# Altium PCB MOD_PWR_SW_PCB.PcbDoc
Units mm, origin at the board's own origin, x right, y up, seen from the top; angles counter-clockwise.
Board outline 152.4 x 101.6 mm, 2 copper layers (Top Layer, Bottom Layer); 37 components, 23 nets, 91 pads, 8 vias.
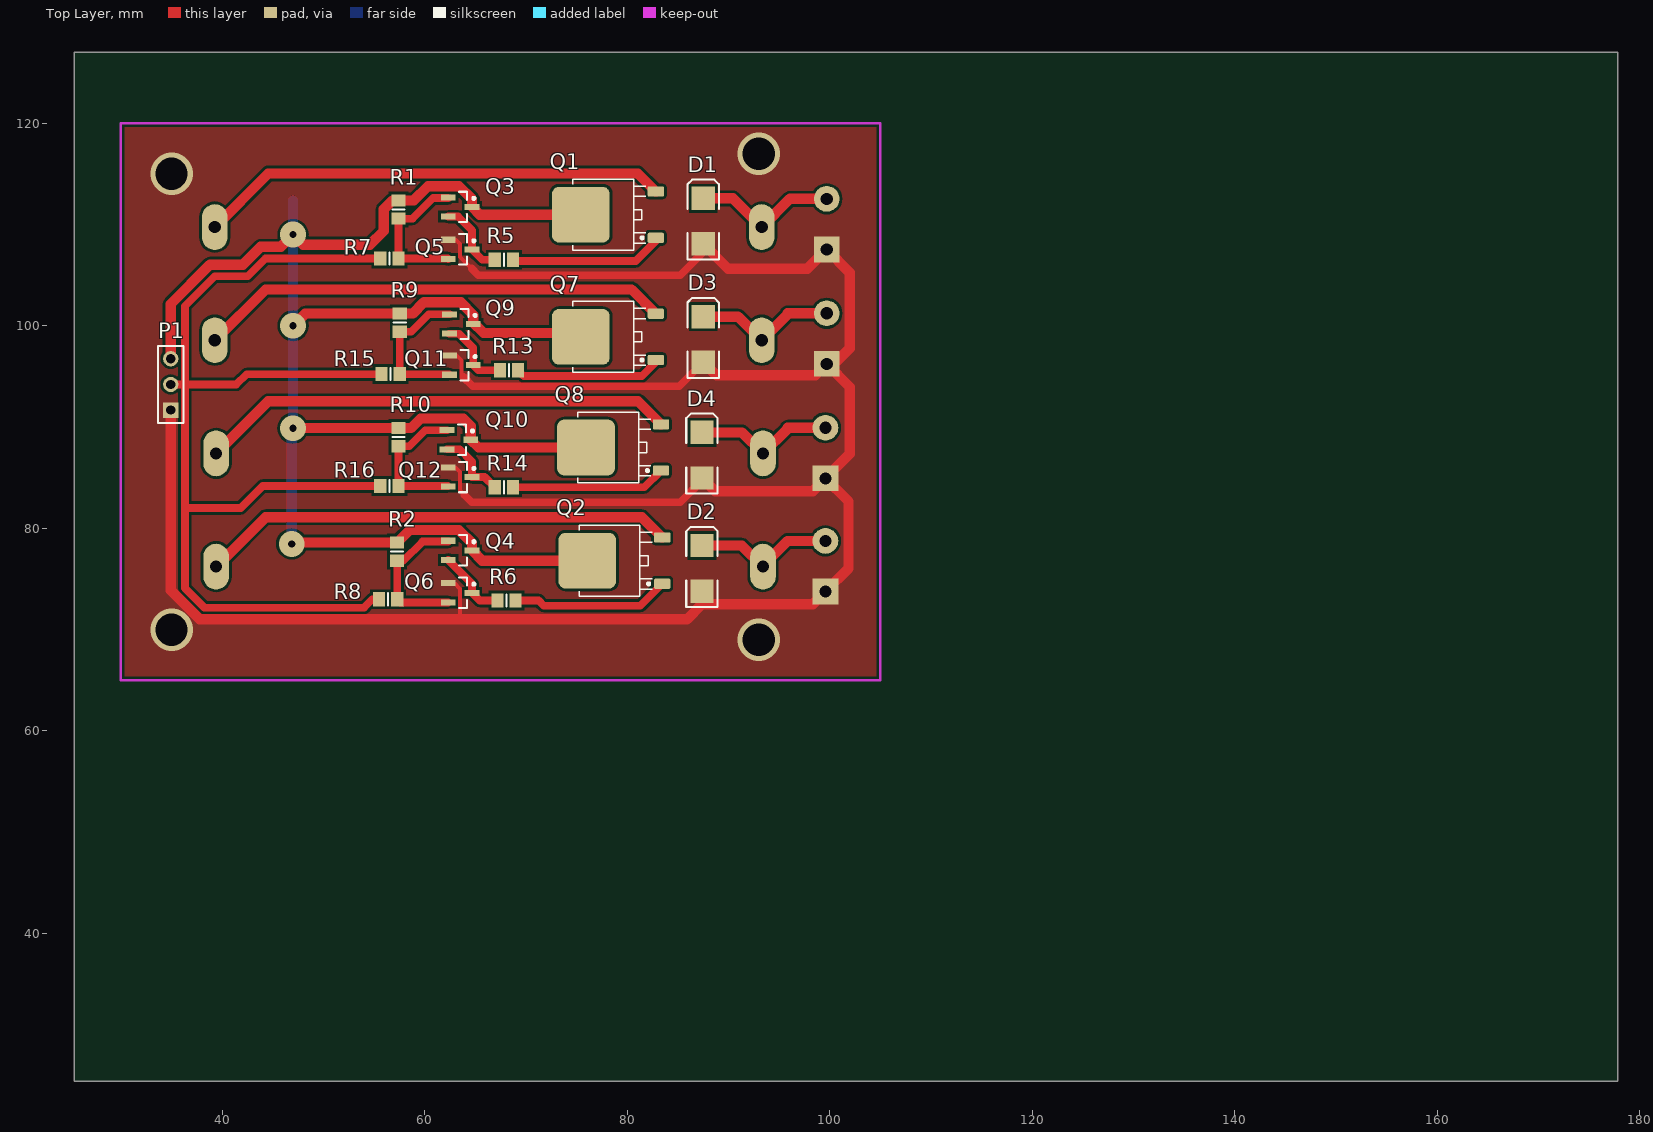
[diagram p0: Top Layer view]
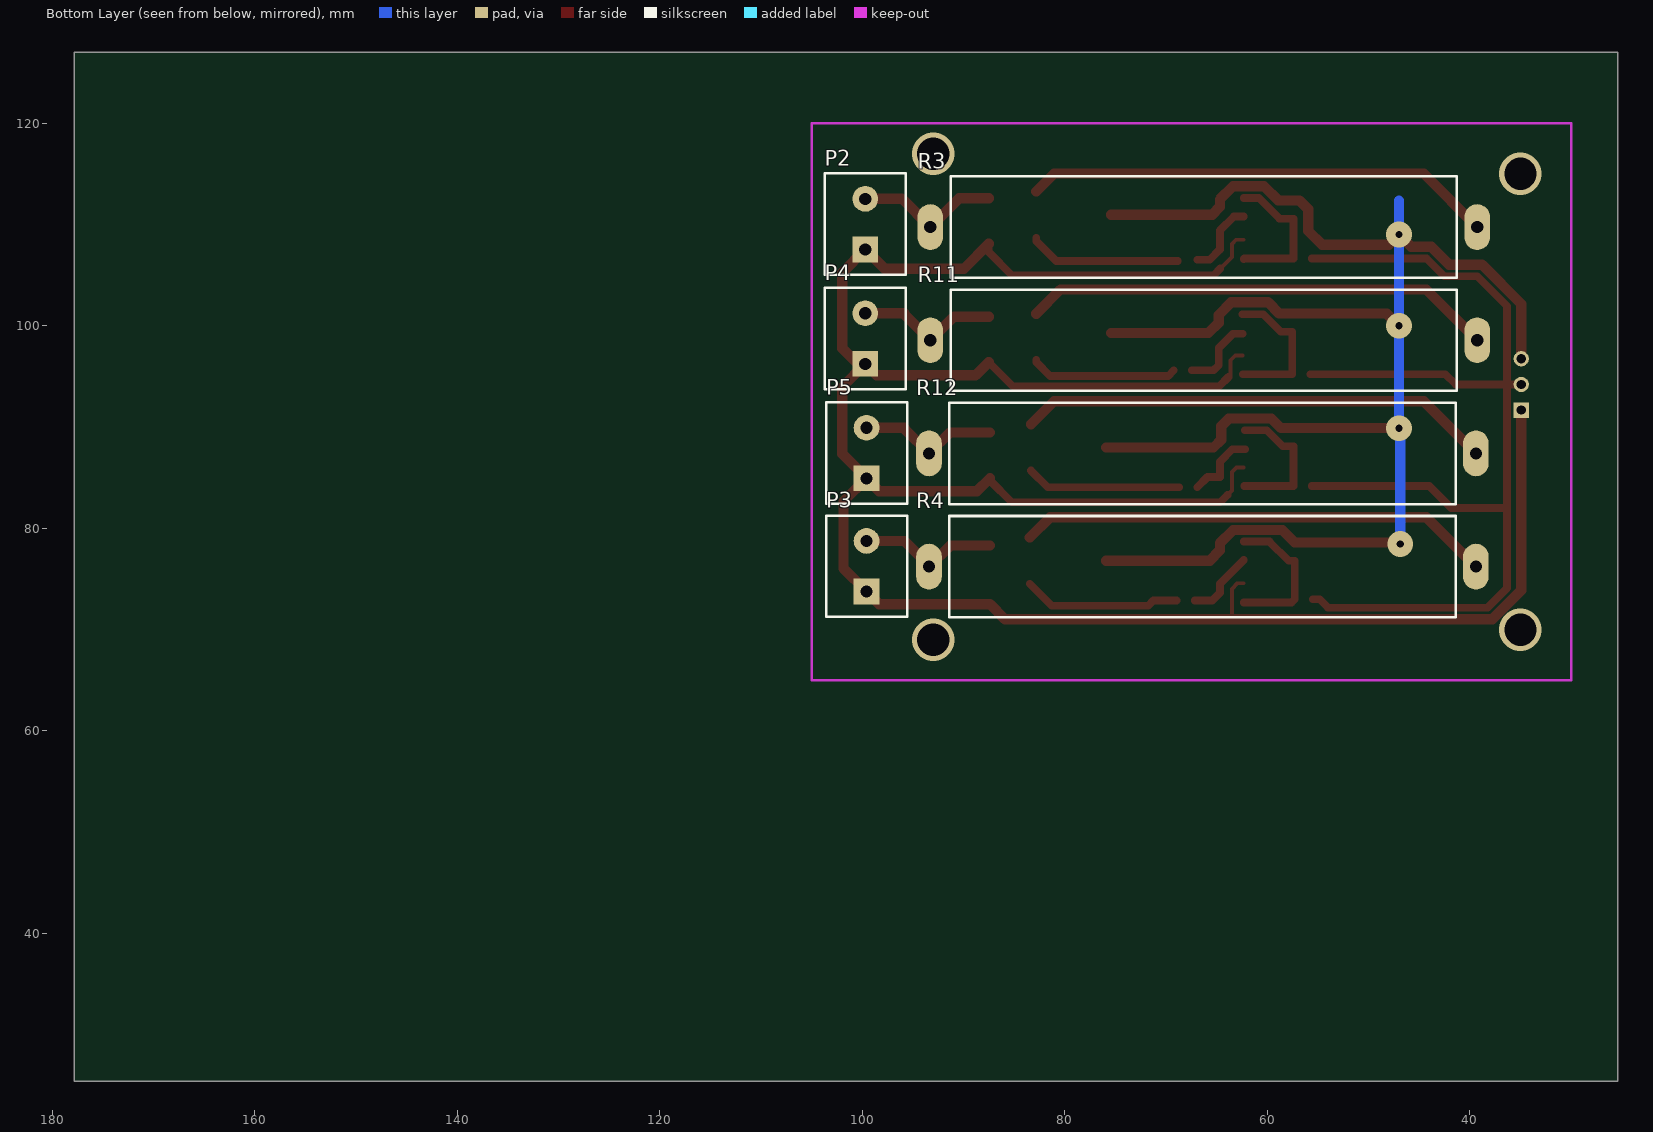
[diagram p1: Bottom Layer view, seen from below]

## Layer stack, top to bottom
Top Solder: solder mask 0.0102, Solder Resist, Dk 3.5
Top Layer: signal copper 0.0356
Dielectric1: dielectric 0.32, FR-4, Dk 4.8
Bottom Layer: signal copper 0.0356
Bottom Solder: solder mask 0.0102, Solder Resist, Dk 3.5

## Board outline
25.4,25.4 177.8,25.4 177.8,127 25.4,127

## Design rules (kind name [scope] priority, off if disabled: settings)
Clearance [All] p1: gap=0.254
PolygonConnect [All] p1: connectstyle=Direct reliefconductorwidth=0.254 reliefentries=4 polygonreliefangle="90 Angle" airgapwidth=0.254
RoutingVias [All] p1: holewidth=0.711 width=1.27 viastyle="Through Hole" minholewidth=0.711 minwidth=1.27 maxholewidth=0.711 maxwidth=1.27
SilkToSolderMaskClearance SilkscreenOverComponentPads [IsPad] p1: minsilkscreentomaskgap=0.254 clearancetoexposedcopper=TRUE
SolderMaskExpansion [All] p1: expansion=0.102
Width "Schematic Width Constraint_9" [InNet('NetD2_2')] p1: maxlimit=1.27 minlimit=0.254 preferedwidth=1.016 bottomlayer_maxwidth=1.016 minimp=50.000000 maximp=50.000000 favimp=50.000000
Width "Schematic Width Constraint_8" [InNet('NetD3_2')] p2: maxlimit=1.27 minlimit=0.254 preferedwidth=1.016 bottomlayer_maxwidth=1.016 minimp=50.000000 maximp=50.000000 favimp=50.000000
Width "Schematic Width Constraint_6" [InNet('NetD4_2')] p3: maxlimit=1.27 minlimit=0.254 preferedwidth=1.016 bottomlayer_maxwidth=1.016 minimp=50.000000 maximp=50.000000 favimp=50.000000
Width "Schematic Width Constraint_5" [InNet('NetQ2_3')] p4: maxlimit=1.27 minlimit=0.254 preferedwidth=1.016 bottomlayer_maxwidth=1.016 minimp=50.000000 maximp=50.000000 favimp=50.000000
Width "Schematic Width Constraint_3" [InNet('NetQ7_3')] p5: maxlimit=1.27 minlimit=0.254 preferedwidth=1.016 bottomlayer_maxwidth=1.016 minimp=50.000000 maximp=50.000000 favimp=50.000000
Width "Schematic Width Constraint_1" [InNet('NetQ8_3')] p6: maxlimit=1.27 minlimit=0.254 preferedwidth=1.016 bottomlayer_maxwidth=1.016 minimp=50.000000 maximp=50.000000 favimp=50.000000
Width "Schematic Width Constraint_7" [InNet('GND_12V')] p7: maxlimit=1.27 minlimit=0.254 preferedwidth=1.016 bottomlayer_maxwidth=1.016 minimp=50.000000 maximp=50.000000 favimp=50.000000
Width "Schematic Width Constraint_4" [InNet('NetQ1_3')] p8: maxlimit=1.27 minlimit=0.254 preferedwidth=1.016 bottomlayer_maxwidth=1.016 minimp=50.000000 maximp=50.000000 favimp=50.000000
Width "Schematic Width Constraint_2" [InNet('NetD1_2')] p9: maxlimit=1.27 minlimit=0.254 preferedwidth=1.016 bottomlayer_maxwidth=1.016 minimp=50.000000 maximp=50.000000 favimp=50.000000
Width "Schematic Width Constraint" [InNet('VCC_12V')] p10: maxlimit=1.27 minlimit=0.254 preferedwidth=1.016 bottomlayer_maxwidth=1.016 minimp=50.000000 maximp=50.000000 favimp=50.000000
Width [All] p11: maxlimit=0.762 minlimit=0.254 preferedwidth=0.254
29 further rules are at their usual default settings.

## Classes and differential pairs
component class transmit_board_CHM: D1 D2 D3 D4 P1 P2 P3 P4 P5 Q1 Q2 Q3 Q5 Q6 Q7 Q8 Q11 Q12 R1 R2 R3 R4 R7 R8 R9 R10 R11 R12 R15 R16

## Components (designator, comment, footprint, x,y, rotation, side; value= is the part's Value field where it differs from the comment)
D1 "S2M" SMB 87.503,110.332 r90 top
D2 "S2M" SMB 87.376,76.042 r90 top
D3 "S2M" SMB 87.503,98.648 r90 top
D4 "S2M" SMB 87.376,87.218 r90 top
P1 "Header 3" HDR1X3 34.925,91.663 r90 top
P2 "Header 2" PCBComponent_1#1 99.695,107.538 r180 bottom
P3 "Header 2" PCBComponent_1#1 99.568,73.756 r180 bottom
P4 "Header 2" PCBComponent_1#1 99.695,96.235 r180 bottom
P5 "Header 2" PCBComponent_1#1 99.568,84.932 r180 bottom
Q1 "FDD4141" TO-252 79.121,110.967 r90 top
Q2 "FDD4141" TO-252 79.756,76.804 r90 top
Q3 "BC817" SOT23_M 63.5,111.729 r0 top
Q4 "BC817" SOT23_M 63.5,77.82 r0 top
Q5 "BC807" SOT23_M 63.5,107.538 r0 top
Q6 "BC807" SOT23_M 63.5,73.629 r0 top
Q7 "FDD4141" TO-252 79.121,98.902 r90 top
Q8 "FDD4141" TO-252 79.629,87.98 r90 top
Q9 "BC817" SOT23_M 63.627,100.172 r0 top
Q10 "BC817" SOT23_M 63.373,88.742 r0 top
Q11 "BC807" SOT23_M 63.627,96.108 r0 top
Q12 "BC807" SOT23_M 63.5,85.059 r0 top
R1 "Res2" 6-0805_N 57.404,111.475 r270 top
R2 "Res2" 6-0805_N 57.277,77.693 r270 top
R3 "Res1" PCBComponent_1#2 41.275,104.744 r90 bottom
R4 "Res1" PCBComponent_1#2 41.402,71.216 r90 bottom
R5 "Res2" 6-0805_N 67.818,106.522 r180 top
R6 "Res2" 6-0805_N 68.072,72.867 r180 top
R7 "Res2" 6-0805_N 56.515,106.649 r180 top
R8 "Res2" 6-0805_N 56.388,72.994 r180 top
R9 "Res2" 6-0805_N 57.531,100.299 r270 top
R10 "Res2" 6-0805_N 57.404,88.996 r270 top
R11 "Res1" PCBComponent_1#2 41.275,93.568 r90 bottom
R12 "Res1" PCBComponent_1#2 41.402,82.392 r90 bottom
R13 "Res2" 6-0805_N 68.326,95.6 r180 top
R14 "Res2" 6-0805_N 67.818,84.043 r180 top
R15 "Res2" 6-0805_N 56.642,95.219 r180 top
R16 "Res2" 6-0805_N 56.515,84.17 r180 top

## Footprints (in the part's own frame and the unit in brackets; to place one, negate y for a bottom-side part, rotate by r counter-clockwise, add the part's x,y. Pads: shape width x height; smd on the part's side, far side on the other; paste and mask are expansions set on the pad)
6-0805_N [mm] "Chip Resistor, Body 2.0x1.2mm, IPC Medium Density"
  rect 1.2x1.4 smd: 1(-0.9,0) 2(0.9,0)
  silkscreen extent 0,-0.6 0,0.6, body extent -1.07,-0.7 1.07,0.7, height 0.7
HDR1X3 [mm] "Connector; Header; 3 Position"
  rect 1.5x1.5 hole 0.9: 1(0,0)
  round 1.5 hole 0.9: 2(2.54,0) 3(5.08,0)
  silkscreen extent -1.27,-1.27 6.35,1.27
PCBComponent_1#1 [mm]
  rect 2.54x2.54 hole 1.2: 1(0,0)
  round 2.54 hole 1.2: 2(0,4.992)
  silkscreen extent -4,-2.5 4,7.5
PCBComponent_1#2 [mm]
  oval 4.524x2.524 hole 1.2: 1(5,52) 2(5,-2)
  silkscreen extent 0,0 10,50
SMB [mm] "DO-214-AA/SMB; 2 C-Bend Leads; Body 5.3 x 3.6 mm, inc. leads (LxW)"
  rect 2.3x2.3 smd: 1(-2.25,0) 2(2.25,0)
  silkscreen extent -3.8,-1.55 4.1,1.55
SOT23_M [mm] "SOT23, 3-Leads, Body 2.9x1.3mm, Pitch 0.95mm, Lead Span 2.3mm - Reverse Pinning, IPC Low Density"
  rect 1.45x0.6 smd: 1(1.175,0) 2(-1.175,-0.95) 3(-1.175,0.95)
  silkscreen extent -0.1,-1.5 1.48,1.5, body extent -0.7,-1.5 0.7,1.5, height 1.1
TO-252 [mm] "D-PAK/TO-252-AA; 3 Leads (1 Cropped); Body 10.3 (inc. leads) x 6.7 mm (LxW max)"
  round 0.5 on Mech15: 0(0,0)
  rrect25% 1x1.6 smd: 1(-2.285,-3.7) 3(2.285,-3.7)
  rrect25% 5.5x5.7 smd: 4(0,3.7)
  silkscreen extent -3.5,-2.7 3.5,4.5, body extent -3.3,-3.95 3.3,5.76, height 2.31

## Part data
D1 D2 D3 D4: library part Diode, "Default Diode"
P1: "Header, 3-Pin"
P2 P3 P4 P5: "Header, 2-Pin"
Q1 Q2 Q7 Q8: library part MOSFET-P, "P-Channel MOSFET"
Q3 Q4 Q9 Q10: library part QNPN, "NPN Bipolar Transistor"
Q5 Q6 Q11 Q12: library part 2N3906, "PNP General Purpose Amplifier"
R1 R2 R3 R4 R5 R6 R7 R8 R9 R10 R11 R12 R13 R14 R15 R16: "Resistor"

## Via types
v1: diameter 2.54, hole 0.711, Top Layer to Bottom Layer, 4 vias
v2: diameter 4.2, hole 3.2, Top Layer to Bottom Layer, 4 vias

## Nets (pads, with @x,y where several pads share a name; then routed paths per layer and width w, separated by ;. In a path a pad name is that pad's centre, name@x,y a point inside that pad or via, vN(x,y) a via of type N, cw(c..) or ccw(c..) an arc to the next point about the centre after c; other vN are vias at no path point)
GND_12V: D1.1 D2.1 D3.1 D4.1 P1.1 P2.1 P3.1 P4.1 P5.1 Q5.3 Q6.3 Q11.3 Q12.3 | length 255.5
  Top Layer w0.381: Q6.3 62.931,74.579 63.5,74.01 63.5,71.024 ; Q12.3 63.058,86.009 63.495,85.572 63.495,83.718 63.919,83.294 ; Q5.3 63.083,108.488 63.495,108.077 63.495,106.795 64.637,105.653 ; Q11.3 63.16,97.058 63.622,96.596 63.622,95.148 63.83,94.94
  Top Layer w0.762: 63.83,94.94 64.759,94.011 85.116,94.011 D3.1 ; 63.919,83.294 64.632,82.581 85.242,82.581 87.376,84.715 D4.1 ; 64.637,105.653 65.292,104.998 85.217,104.998 87.503,107.284 D1.1
  Top Layer w1.016: P1.1 34.925,73.883 37.784,71.024 63.5,71.024 85.908,71.024 87.376,72.492 98.304,72.492 P3.1 101.854,76.042 101.854,82.646 P5.1 ; D4.1 88.676,83.668 98.304,83.668 P5.1 ; D3.1 88.803,95.098 98.558,95.098 P4.1 ; D1.1 89.952,105.633 97.79,105.633 P2.1 101.981,105.252 101.981,97.759 100.457,96.235 P4.1 ; P5.1 101.981,87.345 101.981,93.949 P4.1
  other v2: 93,69 35,70 35,115 93,117
IN: P1.2 R7.2 R8.2 R15.2 R16.2 | length 110.8
  Top Layer w0.762: P1.2 36.322,94.203 ; R8.2 54.827,72.994 54,72.167 38.257,72.167 36.322,74.102 36.322,82 ; R16.2 44,84.17 41.83,82 36.322,82 ; R7.2 44.288,106.649 42.516,104.876 39.268,104.876 36.322,101.93 36.322,94.203 ; R15.2 42.418,95.219 41.402,94.203 36.322,94.203 ; 36.322,82 36.322,94.203
NetD1_2: D1.2 P2.2 R3.1 | length 14.5
  Top Layer w1.016: D1.2 90.437,112.582 R3.1 96.061,112.53 P2.2
NetD2_2: D2.2 P3.2 R4.1 | length 14.1
  Top Layer w1.016: D2.2 91.326,78.292 R4.1@93.357,76.261 ; R4.1 R4.1@93.357,76.261 ; P3.2 95.845,78.748 R4.1@93.357,76.261
NetD3_2: D3.2 P4.2 R11.1 | length 14.3
  Top Layer w1.016: D3.2 90.945,100.898 R11.1 95.845,101.138 95.845,101.227 P4.2
NetD4_2: D4.2 P5.2 R12.1 | length 14.2
  Top Layer w1.016: D4.2 91.326,89.468 R12.1 95.845,89.835 95.845,89.924 P5.2
NetQ1_2: Q1.1 R5.1 | length 15.3
  Top Layer w0.254: R5.1 R5.1@68.845,106.395
  Top Layer w0.762: R5.1@68.845,106.395 80.848,106.395 82.821,108.368 Q1.1
NetQ1_3: Q1.3 R3.2 | length 46.5
  Top Layer w1.016: R3.2 44.562,115.031 81.042,115.031 Q1.3
NetQ2_2: Q2.1 R6.1 | length 15.6
  Top Layer w0.762: R6.1 71.247,72.867 71.755,72.359 81.296,72.359 Q2.1
NetQ2_3: Q2.3 R4.2 | length 46.9
  Top Layer w1.016: R4.2 44.288,81.102 81.443,81.102 Q2.3
NetQ3_2: Q3.3 Q5.2 R1.2 R7.1 | length 14.6
  Top Layer w0.254: R7.1@57.404,106.66 R7.1
  Top Layer w0.762: R7.1@57.404,106.66 R1.2 58.79,110.575 60.833,112.618 Q3.3@62.325,112.618 ; R7.1 62.264,106.649 Q5.2
NetQ3_3: Q3.2 Q5.1 R5.2 | length 7.5
  Top Layer w0.762: Q3.2 63.307,110.779 64.675,109.411 Q5.1 65.691,106.522 R5.2
NetQ4_2: Q4.3 Q6.2 R2.2 R8.1 | length 14.8
  Top Layer w0.762: Q6.2 57.603,72.679 R8.1 57.277,73.005 R2.2 57.895,76.793 59.791,78.689 Q4.3@62.325,78.689
NetQ4_3: Q4.2 Q6.1 R6.2 | length 7
  Top Layer w0.762: Q4.2 64.675,74.52 Q6.1 65.437,72.867 R6.2
NetQ7_2: Q7.1 R13.1 | length 14.6
  Top Layer w0.762: R13.1 69.799,95.027 81.432,95.027 82.821,96.416 Q7.1
NetQ7_3: Q7.3 R11.2 | length 46.6
  Top Layer w1.016: R11.2 44.288,103.581 80.427,103.581 Q7.3
NetQ8_2: Q8.1 R14.1 | length 15.3
  Top Layer w0.762: R14.1 81.677,84.043 Q8.1
NetQ8_3: Q8.3 R12.2 | length 47
  Top Layer w1.016: R12.2 44.542,92.532 81.062,92.532 Q8.3
NetQ9_2: Q9.3 Q11.2 R9.2 R15.1 | length 14.7
  Top Layer w0.254: R15.1@57.531,95.23 R15.1
  Top Layer w0.762: R15.1@57.531,95.23 R9.2 58.663,99.399 60.386,101.122 Q9.3 ; R15.1 Q11.2@62.391,95.219
NetQ9_3: Q9.2 Q11.1 R13.2 | length 7.5
  Top Layer w0.762: Q9.2 63.383,99.222 64.802,97.803 Q11.1 65.31,95.6 R13.2
NetQ10_2: Q10.3 Q12.2 R10.2 R16.1 | length 14.2
  Top Layer w0.254: R16.1@57.404,84.181 R16.1
  Top Layer w0.762: R16.1@57.404,84.181 R10.2 58.46,88.096 60.056,89.692 Q10.3 ; R16.1 Q12.2@62.264,84.17
NetQ10_3: Q10.2 Q12.1 R14.2 | length 7.2
  Top Layer w0.762: Q10.2 63.459,87.792 64.675,86.576 Q12.1 65.902,85.059 R14.2
VCC_12V: P1.3 Q1.4 Q2.4 Q3.1 Q4.1 Q7.4 Q8.4 Q9.1 Q10.1 R1.1 R2.1 R9.1 R10.1 | length 185.4
  Top Layer w1.016: P1.3 34.925,102.149 38.795,106.019 42.042,106.019 43.815,107.792 45.792,107.792 v1(47,109) 48,108 54.588,108 55.942,109.354 55.942,111.491 56.826,112.375 R1.1 58.939,112.375 60.325,113.761 63.389,113.761 64.675,112.475 Q3.1 65.437,110.967 Q1.4 ; v1(46.863,78.455) 47.001,78.593 R2.1 58.516,79.832 63.366,79.832 64.675,78.523 Q4.1 65.691,76.804 Q2.4@75.929,76.804 ; v1(46.99,89.885) 47.001,89.896 R10.1 58.643,89.896 59.582,90.835 63.793,90.835 64.548,90.08 Q10.1 65.31,87.98 Q8.4 ; v1(47,100) 48.199,101.199 R9.1 58.812,101.199 59.924,102.311 63.552,102.311 64.802,101.061 64.802,100.299 65.818,99.283 Q7.4@75.421,99.283
  Bottom Layer w1.016: v1(46.863,78.455) 46.863,89.758 v1(46.99,89.885) 46.99,112.364 47,112.354 v1(47,109)
pads on no net: Q1.0 Q2.0 Q7.0 Q8.0

## Polygon pours and split planes (outlines as drawn)
GND_12V on Top Layer "Top Layer-No Net" (solid, pour order 2): 30,120 105,120 105,65 30,65

## Keep-outs
Keep-Out Layer:
  lines w0.254: 30,65 30,120 105,120 105,65 30,65